# Altium PCB HBridge.PcbDoc (part 3 of 4)
Units mil, origin at the board's own origin, x right, y up, seen from the top; angles counter-clockwise.
Board outline 2900.19 x 4650 mil, 2 copper layers (Top Layer, Bottom Layer), stack 33.512 mil thick; 136 components, 122 nets, 499 pads, 559 vias.
Unrouted connection lines stored in the file: 1.
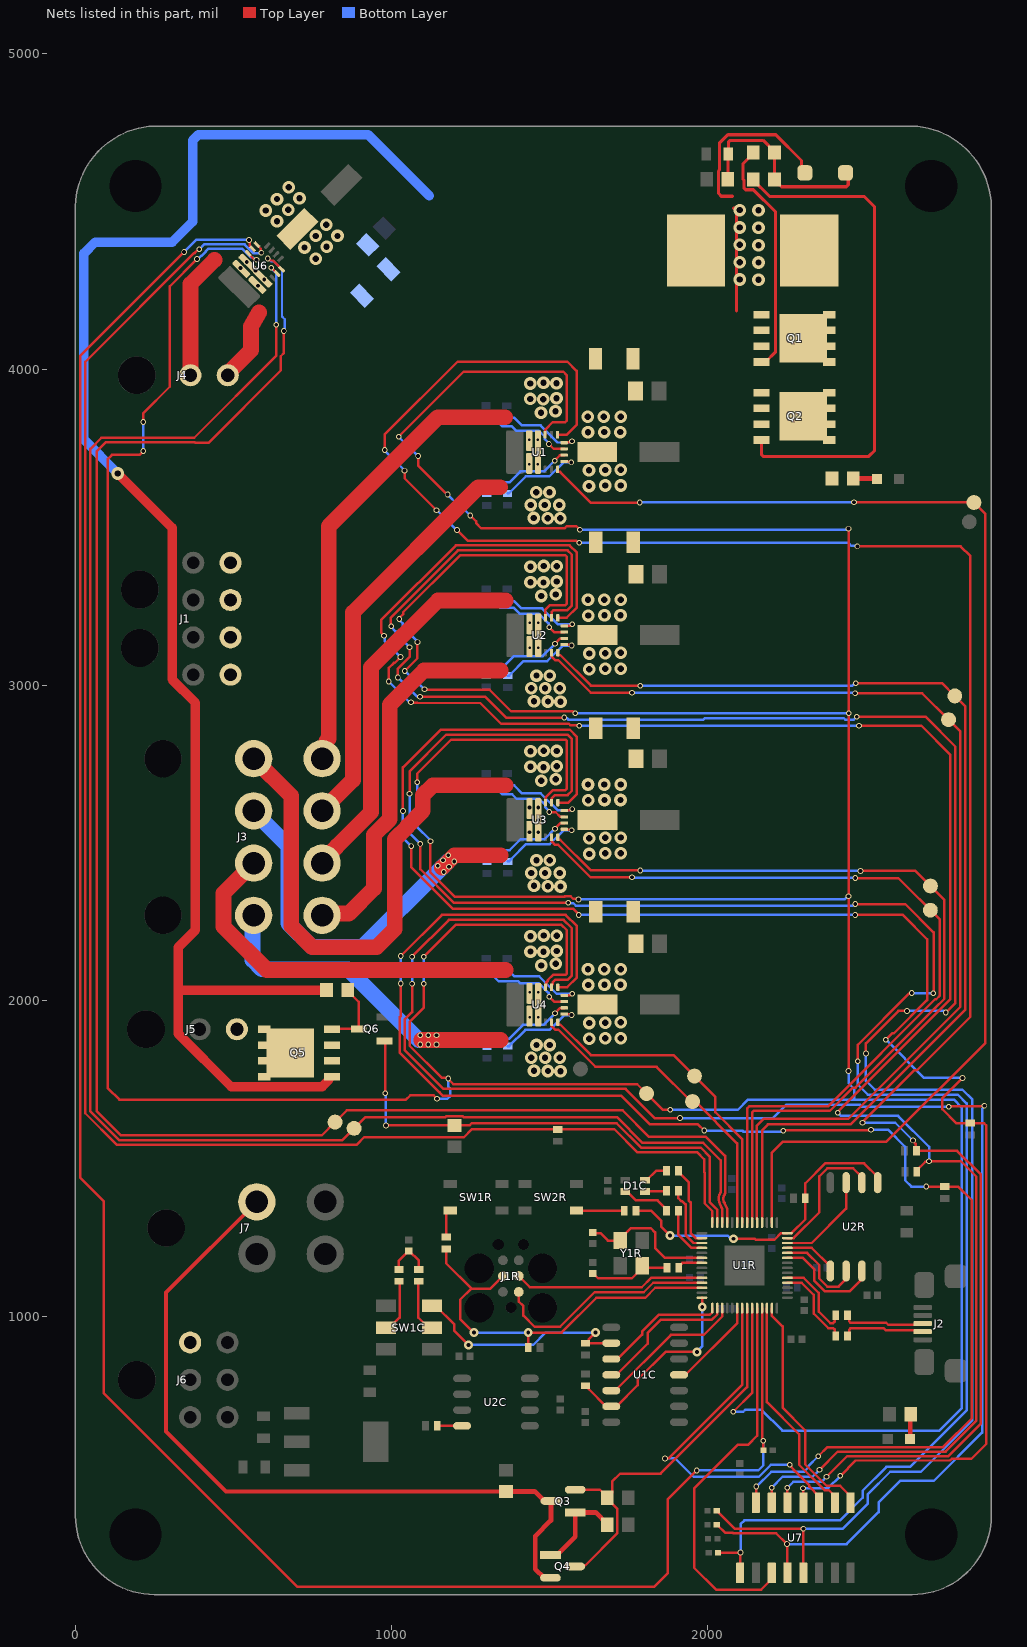
[diagram p2: the nets of this part, all layers, seen from the top]

## Via types
v1: diameter 40, hole 20, Top Layer to Bottom Layer, tented both sides, 289 vias
v2: diameter 18, hole 11.81, Top Layer to Bottom Layer, tented both sides, 171 vias
v3: diameter 27.56, hole 11.81, Top Layer to Bottom Layer, 32 vias
v4: diameter 19.68, hole 7.87, Top Layer to Bottom Layer, 21 vias
v5: diameter 19.68, hole 11.81, Top Layer to Bottom Layer, 14 vias
v6: diameter 27.56, hole 11.81, Top Layer to Bottom Layer, tented top, 9 vias
v7: diameter 45.28, hole 27.56, Top Layer to Bottom Layer, 7 vias
v8: diameter 31.5, hole 15.75, Top Layer to Bottom Layer, 7 vias
v9: diameter 31.5, hole 15.75, Top Layer to Bottom Layer, tented top, 6 vias
v10: diameter 26, hole 11.81, Top Layer to Bottom Layer, 1 vias
v11: diameter 22, hole 10, Top Layer to Bottom Layer, tented both sides, 1 vias
v12: diameter 28, hole 12, Top Layer to Bottom Layer, tented both sides, 1 vias

## Nets (pads, with @x,y where several pads share a name; then routed paths per layer and width w, separated by ;. In a path a pad name is that pad's centre, name@x,y a point inside that pad or via, vN(x,y) a via of type N, cw(c..) or ccw(c..) an arc to the next point about the centre after c; other vN are vias at no path point) (continued)
HBRIDGE1_nFAULT: R2.2 U1.1 U7.13 | length 6947.1
  Top Layer w7.87: v2(979,3744) 979,3793 1209.75,4023.75 1557.92,4023.75 1586.9,3994.78 1586.9,3823.9 1555.96,3792.96 U1.1@1526.48,3792.96 ; v2(1042,3679) 1042.75,3678.25 1042.75,3654.25 v2(1143.47,3553.53) ; v2(1208,3491) 1241.84,3457.16 1585.53,3457.16 1592.29,3450.4 v2(1595.03,3450.4) ; v2(2254,458) 2254.41,457.59 2254.41,411.63 U7.13@2254.81,411.22 ; v2(2378,493) 2443.72,558.72 2763.93,558.72 2867,661.79 2867,664.54 2867.17,664.72 2867.17,1448.87 2867,1449.04 2867,1449.85 2791.85,1525 R2.2@2662.7,1525 2660.3,1527.4 2660.3,1546.96 2651.88,1555.38 v2(2651.88,1558.12) ; v2(2476,3439) 2802.76,3439 2833.76,3408 2833.76,1949.76 2663.85,1779.85 2655.85,1779.85 2492,1616 v2(2492,1614)
  Bottom Layer w7.87: v2(979,3744) 979,3743 1042,3680 v2(1042,3679) ; v2(1143.47,3553.53) 1144.47,3553.53 1207,3491 v2(1208,3491) ; v2(1595.03,3450.4) 2446.25,3450.4 2450.72,3445.94 2451.25,3445.94 2456.25,3440.94 2474.06,3440.94 v2(2476,3439) ; v2(2254,458) 2273,477 2362,477 v2(2378,493) ; v2(2492,1614) 2596,1614 2651.38,1558.62 v2@2651.38,1557.62
HBRIDGE1_OUT1: J3.7 U1.7 | length 1299.1
  Top Layer w50: J3.7@780.94,2601.65 879,2699.71 879,3229.85 1275.15,3626 1345.15,3626
  other v4: 1436.91,3698.47
HBRIDGE1_OUT2: J3.8 U1.5 | length 1446.7
  Top Layer w50: J3.8@780.94,2767 793.97,2780.03 793.97,2822.31 802,2830.34 802,3502.85 1147.15,3848 1361.15,3848
  other v4: 1436.91,3777.21
HBRIDGE1_PH: H1PH.TP U1.10 U1R.2 | length 4137.4
  Top Layer w7.87: U1.10@1526.48,3682.72 1526.48,3675.83 1527.46,3674.85 1534.35,3674.85 1631.2,3578 v2(1787.15,3578) ; U1R.2@2205.47,1297.7 2205.47,1519.47 2240,1554 2568,1554 2881,1867 2881,3542 2840.27,3582.73 2836.04,3578.5 2465.5,3578.5 v2(2465,3579)
  Bottom Layer w7.87: v2(1787.15,3578) 1787.65,3578.5 2464.5,3578.5 v2(2465,3579)
HBRIDGE2_EN: H2EN.TP U1R.5 U2.9 | length 3373.3
  Top Layer w7.87: U2.9@1507.65,3102.72 1508.63,3101.74 1508.63,3089.14 1518.67,3079.1 1528.68,3079.1 1631.78,2976 v2(1762,2976) ; U1R.5@2158,1308.81 2158,1605 2179,1626 2447,1626 2802.26,1981.26 2802.26,2852.74 H2EN.TP@2764.63,2890.37 2681,2974 v2(2468.73,2974)
  Bottom Layer w7.87: v2(1762,2976) 2463.99,2976 2465.99,2974 v2(2468.73,2974)
HBRIDGE2_IPROPI: R8.2 U2.2 U7.5 | length 6795.8
  Top Layer w7.87: v2(1000,3186) 998.58,3187.42 998.58,3213.85 1211.23,3426.5 1558.16,3426.5 1572,3412.67 1572,3252.09 1556.49,3236.58 1513.24,3236.58 1508.63,3231.97 1508.63,3213.94 U2.2@1507.65,3212.96 ; v2(1021,3024) 1021,3052.16 1057.99,3089.15 v2(1058,3120) ; v2(1091,2963) 1091.33,2963.33 1297.3,2963.33 1363.48,2897.16 v2(1548,2897.16) ; R8.2@2030.76,385 2031.75,385 2088.75,328 v2(2305,328) 2304.91,327.91 2304.91,188.87 U7.5@2304.81,188.78 ; v2@2474.68,2900 2691,2900 2786.51,2804.49 2786.51,1993.57 v2(2755.97,1963.03) ; v2(2503,1833) 2503,1865.12 2605.88,1968 v2(2633,1968)
  Bottom Layer w7.87: v2(1000,3186) 1000,3183.57 1013.5,3170.07 1013.5,3164.5 v2(1058,3120) ; v2(1021,3024) 1080.06,2964.94 1089.06,2964.94 v2(1091,2963) ; v2(1548,2897.16) 1549.94,2895.22 1556.78,2895.22 1561.16,2890.84 1988.55,2890.84 1992.96,2895.25 2432.78,2895.25 2437.84,2890.19 2464.19,2890.19 v2(2474,2900) ; v2(2305,328) 2429,328 2509,408 2509,438 2580,509 2677,509 2840.25,672.25 2840.25,1687 2808.76,1718.5 2531.5,1718.5 2503,1747 v2(2503,1833) ; v2(2633,1968) v2(2633,1968) 2748.31,1967.95 2753.23,1963.03 v2(2755.97,1963.03)
HBRIDGE2_nFAULT: R3.2 U2.1 U7.14 | length 6529.1
  Top Layer w7.87: v2(976.89,3156.11) 976.89,3156.89 968,3165.78 968,3205.54 1204.71,3442.25 1564.69,3442.25 1587.75,3419.19 1587.75,3245.57 1555.14,3212.96 U2.1@1527.33,3212.96 ; v2(992,3011) 992,3054 1008.34,3070.34 1011.12,3070.34 v2(1029.39,3088.61) ; v2(1062.35,2945.65) 1064.29,2943.71 1082.23,2943.71 1082.78,2943.16 1281.84,2943.16 1347.69,2877.32 1562.56,2877.32 1567.01,2872.87 1593.13,2872.87 v2(1595,2871) ; U7.14@2204.81,411.22 2204.91,411.31 2204.91,457.91 v2(2205,458) ; v2(2356,515) 2413.89,572.89 2755.3,572.89 2853,670.59 2853,1443 2803.88,1492.12 v2(2702.88,1492.12) 2700.94,1490.18 2690.95,1490.18 2663.7,1462.93 R3.2@2663.7,1458.99 ; v2(2414,1645.84) 2414,1648.58 2419.06,1653.65 2419.06,1654.19 2770.76,2005.89 2770.76,2779 2678.76,2871 v2(2481,2871)
  Bottom Layer w7.87: v2(976.89,3156.11) 978.83,3154.17 978.83,3139.17 v2(1029.39,3088.61) ; v2(992,3011) 1055.42,2947.58 1060.42,2947.58 v2(1062.35,2945.65) ; v2(1595,2871) v2(2481,2871) ; v2(2205,458) 2205,459 2239,493 2334,493 v2(2356,515) ; v2(2414,1645.84) 2414,1645.68 2423.68,1636 2605,1636 2703,1538 v2@2703,1492
HBRIDGE2_OUT1: J3.5 U2.7 | length 1197.5
  Top Layer w50: J3.5@780.94,2270.94 786.23,2276.23 865.23,2276.23 945,2356 945,2525 995,2575 995,2937.51 1103.49,3046 1346,3046
  other v4: 1437.76,3118.47
HBRIDGE2_OUT2: J3.6 U2.5 | length 1197.6
  Top Layer w50: J3.6@776.94,2438.48 777.58,2438.48 828.59,2489.49 828.59,2490.13 936,2597.54 936,3056 1148,3268 1362,3268
  other v4: 1437.76,3197.21
HBRIDGE2_PH: H2PH.TP U1R.4 U2.10 | length 3412.7
  Top Layer w7.87: U2.10@1527.33,3102.72 1527.33,3095.83 1528.31,3094.85 1535.2,3094.85 1632.05,2998 v2(1788,2998) ; U1R.4@2174,1311.01 2174,1590 2192.84,1608.84 2453.84,1608.84 2818.01,1973.01 2818.01,2932 H2PH.TP@2784.33,2965.68 2744.01,3006 v2(2471,3006)
  Bottom Layer w7.87: v2(1788,2998) 2460.26,2998 2468.26,3006 v2(2471,3006)
HBRIDGE3_EN: H3EN.TP U1R.7 U3.9 | length 2704
  Top Layer w7.87: U3.9@1508.63,2516.74 1508.63,2504.14 1518.67,2494.1 1528.68,2494.1 1631.78,2391 v2(1762,2391) ; U1R.7@2126.73,1297.7 2126.73,1377.63 2127.39,1378.29 2127.39,1659.78 2134.61,1667 2384.06,1667 2722.09,2005.03 2725.66,2005.03 2737.28,2016.65 2737.28,2256.98 2605.35,2388.92 v2(2469.17,2388.92)
  Bottom Layer w7.87: v2(1762,2391) 1763.04,2389.96 2468.13,2389.96 v2(2469.17,2388.92)
HBRIDGE3_IPROPI: R20.2 U3.2 U7.1 | length 5926.3
  Top Layer w7.87: v2(1057.81,2656) 1057.81,2726.81 1174,2843 1558.53,2843 1572,2829.53 1572,2665.42 1558.16,2651.58 1518.67,2651.58 1507.65,2640.56 U3.2@1507.65,2627.96 ; v2(1092,2497) 1092,2416.67 1197.67,2311 v2(1560,2311) ; R20.2@2034.76,253 v2(2106,253) 2105.41,252.41 2105.41,189.37 U7.1@2104.81,188.78 ; v2(2469.15,2306.49) 2627.51,2306.49 2717.44,2216.56 2717.44,2025.03 v2(2716.47,2024.06) ; v2(2477,1809) 2477,1860.7 2639.23,2022.93 2646.19,2022.93 v2(2648.13,2024.87)
  Bottom Layer w7.87: v2(1057.81,2656) 1057.81,2531.19 v2(1092,2497) ; v2(1560,2311) 1561.94,2309.06 1576.88,2309.06 1584.78,2301.16 2461.08,2301.16 2465.82,2305.9 v2@2467,2305.9 ; v2(2106,253) 2106,343 2118,355 2421,355 2493,427 2493,449.52 2567.61,524.14 2642.86,524.14 2822,703.27 2822,1675 2794.25,1702.75 2509.25,1702.75 2477,1735 v2(2477,1809) ; v2(2648.13,2024.87) 2648.53,2024.47 2716.07,2024.47 v2(2716.47,2024.06)
HBRIDGE3_nFAULT: R18.2 U3.1 U7.12 | length 5565.4
  Top Layer w7.87: v2(1037,2601) 1037,2739 1157,2859 1560.83,2859 1561.14,2858.69 1565.31,2858.69 1588,2836 1588,2655 1561,2628 1552.18,2628 1552.14,2627.96 U3.1@1527.33,2627.96 ; v2(1063,2490) 1063,2423.4 1195.24,2291.16 1576.41,2291.16 1594.06,2273.51 v2(1594.06,2271.94) ; v2(2304,457) 2304.41,456.59 2304.41,411.63 U7.12@2304.81,411.22 ; v2(2422,496) 2470.54,544.54 2769.8,544.54 2775.26,550 2837,550 2884.13,597.13 2884.13,1605.39 2877.52,1612 2831,1612 2789.94,1612 2745.16,1656.78 2745.16,1692.16 v2(2809,1756) ; v2(2468.73,2272) 2619.76,2272 2696.63,2195.13 2696.63,2002.63 2591.19,1897.19 2586.19,1897.19 v2(2566,1877)
  Bottom Layer w7.87: v2(1037,2601) 1037,2516 v2(1063,2490) ; v2@1594.09,2271.97 v2(2468.73,2272) ; v2(2304,457) 2383,457 v2(2422,496) ; v2(2566,1877) 2687,1756 v2(2809,1756)
HBRIDGE3_OUT1: J3.3 U3.7 | length 1268.3
  Top Layer w50: 1161,2422 1200,2461 1346,2461
  Top Layer w70: J3.3@560.4,2590.81 J3.3@560.4,2603.83
  Bottom Layer w50: J3.3@560.4,2603.83 674,2490.23 674,2246.05 749.05,2171 909,2171 1155,2417 1180,2442
  other v2: 1166,2408 1183,2425 1147,2428 1199,2441 1164,2445 1180,2461
  other v5: 1437.76,2533.47
HBRIDGE3_OUT2: J3.4 U3.5 | length 1694
  Top Layer w50: J3.4@564.4,2767 683,2648.4 683,2237.05 750.05,2170 953.3,2170 1011,2227.7 1011,2511.38 1051.3,2551.68 1051.3,2553.3 1100,2602 1100,2650.78 1132.22,2683 1362,2683
  other v5: 1437.76,2612.21
HBRIDGE3_PH: H3PH.TP U1R.6 U3.10 | length 2716.9
  Top Layer w7.87: U3.10@1527.33,2517.72 1527.33,2510.83 1528.31,2509.85 1535.2,2509.85 1632.05,2413 v2(1788,2413) ; U1R.6@2142.48,1310.98 2142.48,1646.64 2147.09,1651.25 2388.58,1651.25 2462.64,1725.31 2470.14,1725.31 2721.95,1977.12 2751.46,2006.62 2751.46,2319.56 H3PH.TP@2707.3,2363.72 2659.58,2411.43 v2(2486.05,2411.43)
  Bottom Layer w7.87: v2(1788,2413) 1788.78,2412.22 2485.27,2412.22 v2(2486.05,2411.43)
HBRIDGE4_EN: H4EN.TP U1R.9 U4.9 | length 1004.4
  Top Layer w7.87: U4.9@1507.64,1932.72 1508.62,1931.74 1508.62,1919.14 1518.66,1909.1 1528.68,1909.1 1646,1791.78 1646,1791 1840,1791 H4EN.TP@1952,1679 ; H4EN.TP@1954,1681 1963,1681 2095.24,1548.76 U1R.9@2095.24,1297.7
HBRIDGE4_IPROPI: R21.2 U4.2 U7.4 | length 5214.1
  Top Layer w7.87: v2(1066,2054) 1066,1964.52 1042.44,1940.97 1042.44,1844.56 1166,1721 1742,1721 1834,1629 v2(1914.48,1629) ; v2(1066,2139.87) 1182.63,2256.5 1545.5,2256.5 1572,2230 1572,2080.42 1558.16,2066.58 1518.66,2066.58 1510.59,2058.51 1510.59,2052.8 1507.17,2049.39 U4.2@1507.17,2043.42 ; R21.2@2030.76,341 2031.75,341 2057.75,315 2081.7,315 2082.88,313.83 2219.17,313.83 v2(2253,280) 2253.91,279.09 2253.91,189.69 U7.4@2254.81,188.78 ; v2(2765,1665) 2766.45,1666.45 2876.68,1666.45 v2(2878.13,1667.9)
  Bottom Layer w7.87: v2(1066,2139.87) v2(1066,2054) v2@1067,2053 ; v2(1914.48,1629) 2209,1629 2251.25,1671.25 2483.89,1671.25 2490.14,1665 v2(2765,1665) ; v2(2253,280) 2442,280 2543.19,381.19 2543.19,411.89 2611.12,479.83 2717.83,479.83 2871,633 2871,1658.22 2878.13,1665.35 v2(2878.13,1667.9)
HBRIDGE4_nFAULT: R19.2 U4.1 U7.15 | length 4758.4
  Top Layer w7.87: v2(1029.94,2055.06) 1029.94,1951.64 1026.69,1948.39 1026.69,1836.31 1153.16,1709.84 1153.22,1709.84 1164.06,1699 1729,1699 1818.9,1609.1 1971.23,1609.1 v2(1991.07,1589.26) ; v2(1029.94,2141.81) 1160.38,2272.25 1552.02,2272.25 1587.75,2236.52 1587.75,2073.9 1556.81,2042.96 U4.1@1527.32,2042.96 ; U7.15@2154.81,411.22 2155.41,411.81 2155.41,461.41 v2(2156,462) ; v2(2241,1589) 2242.5,1590.5 2517.5,1590.5 v2(2519,1592) ; v2(2352,558) 2381.06,587.06 2747.47,587.06 2838,677.59 2838,1369 2795,1412 2753,1412 v2(2694,1412)
  Bottom Layer w7.87: v2(1029.94,2055.06) v2(1029.94,2141.81) ; v2(1991.07,1589.26) 1992.11,1588.22 2112.43,1588.22 2115.65,1585 2234.26,1585 2238.26,1589 v2(2241,1589) ; v2(2156,462) 2156.43,462 2203.43,509 2307,509 2321,523 2321,527 v2(2352,558) ; v2(2519,1592) 2573,1592 2627,1538 2627,1432 2647,1412 v2(2694,1412)
HBRIDGE4_OUT1: J3.1 U4.7 | length 1107.5
  Top Layer w50: 1095,1876 1346,1876
  Bottom Layer w50: J3.1@560.4,2273.12 560.4,2129.29 589.69,2100 863,2100 1087,1876 1168.16,1876
  other v2: 1092,1862 1117,1862 1143,1862 1092,1891 1117,1891 1143,1891
  other v4: 1437.75,1948.47
HBRIDGE4_OUT2: J3.2 U4.5 | length 1191.8
  Top Layer w50: J3.2@560.4,2438.48 560.4,2432.75 468.47,2340.83 468.47,2235.05 605.52,2098 1362,2098
  other v4: 1437.75,2027.21
HBRIDGE4_PH: H4PH.TP U1R.8 U4.10 | length 1027.4
  Top Layer w7.87: U4.10@1527.32,1925.83 1528.31,1924.85 1535.2,1924.85 1632.05,1828 1894,1828 H4PH.TP@1960.11,1761.89 2026.23,1695.77 2026.23,1647.29 2110.98,1562.53 U1R.8@2110.98,1297.7
HBRIDGE5_EN: H5EN.TP U1R.12 U6.9 | length 5443.1
  Top Layer w7.87: v2(620.1,4321.3) 620.27,4321.3 638.65,4302.92 U6.9@638.82,4302.92 ; v2(636,4141) 636,4043.15 376.01,3783.16 82.16,3783.16 47,3748 47,1650.08 137.91,1559.17 845.17,1559.17 H5EN.TP@882.39,1596.39 917.78,1631.78 1171.14,1631.78 1173.8,1634.44 1226.2,1634.44 1228.86,1631.78 1714.22,1631.78 1796,1550 1988,1550 2042.63,1495.37 2042.63,1394.68 cw(c2034.75,1394.72) 2041.62,1390.86 ccw(c2073,1373) 2039.94,1358.47 2047.99,1340.15 U1R.12@2047.99,1297.7
  Bottom Layer w7.87: v2(620.1,4321.3) 620.1,4318.9 636,4303 v2(636,4141)
HBRIDGE5_IPROPI: R34.2 U1R.39 U6.2 | length 7205.8
  Top Layer w7.87: v2(344,4371.22) 15.75,4042.97 15.75,1439.25 90,1365 90,757 703,144 1832,144 1876,188 1876,422.24 v2(1966.88,513.12) ; v2(549.4,4409.4) 551.34,4407.46 551.34,4391.79 560.87,4382.26 U6.2@560.87,4380.87 ; U1R.39@2173.98,1027.03 2173.98,613.76 2178,609.74 v2(2178,607) 2178.12,606.88 2178.12,577.12 R34.2@2178.24,577
  Bottom Layer w7.87: v2(344,4371.22) 382.18,4409.4 v2(549.4,4409.4) ; v2@1965,513 2162,513 2178,529 v2(2178,607)
HBRIDGE5_nFAULT: R33.2 U1R.14 U6.1 | length 5405.9
  Top Layer w7.87: v2(392.12,4379.88) 389.38,4379.88 377.31,4367.81 375.81,4367.81 31,4023 31,1644 130,1545 891,1545 914,1568 1230,1568 1255.7,1593.7 1527,1593.7 1705.94,1593.7 1779.64,1520 1969.13,1520 1991.06,1498.06 1991.06,1456.94 1992,1456 1992,1359.07 2016.5,1334.57 U1R.14@2016.5,1297.7 ; U6.1@574.79,4394.79 574.79,4393.4 586.8,4381.39 586.8,4371.01 v2(588.74,4369.08)
  Bottom Layer w7.87: v2(392.12,4379.88) 407.43,4395.22 535.51,4395.22 562.73,4368 587.66,4368 v2(588.74,4369.08)
HBRIDGE5_OUT1: J4.2 U6.7 | length 236.1
  Top Layer w50: J4.2@482.13,3981 482.13,3986.41 556,4060.28 556,4135 581,4180
  other v5: 578.27,4264.64
HBRIDGE5_OUT2: J4.1 U6.5 | length 396.5
  Top Layer w50: J4.1@364.02,3981 364.04,4270.04 440.05,4346.05
  other v5: 522.59,4320.32
HBRIDGE5_PH: H5PH.TP U1R.11 U6.10 | length 5551.1
  Top Layer w7.87: 377.58,3768.58 95.58,3768.58 67,3740 67,1651 144,1574 780,1574 H5PH.TP@822,1616 859,1653 1733.05,1653 1816.63,1569.42 1996.58,1569.42 2056.8,1509.2 2056.8,1390.58 cw(c2048.92,1390.58) 2055.29,1385.94 ccw(c2073,1373) 2055.26,1360.1 cw(c2048.92,1355.42) 2056.18,1358.48 2063.74,1340.55 U1R.11@2063.74,1297.7 ; 379.53,3766.63 379.9,3767 421,3767 650.17,3996.17 650.17,4041.17 660,4051 v2(660,4121) ; v2(609.29,4350.38) 611.79,4350.38 617.84,4344.33 625.13,4344.33 652.63,4316.84 U6.10@652.74,4316.84
  Bottom Layer w7.87: v2(609.29,4350.38) 612.03,4350.38 620.87,4341.54 627.92,4341.54 654,4315.46 654,4166.96 662.75,4158.21 662.75,4142.35 661.94,4141.54 661.94,4122.94 v2(660,4121)
INT_RP2CAN: U1C.4 U1R.34 | length 299.7
  Top Layer w7.87: U1C.4@1911.18,815.91 1932.17,815.91 2095.24,978.97 U1R.34@2095.24,1027.03
LEDB_RP2CAN: R8C.1 U1R.18 | length 168.1
  Top Layer w7.87: R8C.1@1909.21,1335.59 1909.21,1258.94 1950.67,1217.48 U1R.18@1983.52,1217.48
LEDG_RP2CAN: R7C.1 U1R.17 | length 213.3
  Top Layer w7.87: R7C.1@1909.21,1398.58 1909.21,1374.96 1919.07,1365.1 1921.99,1365.1 1931.85,1355.25 1931.85,1258.57 1957.19,1233.23 U1R.17@1983.52,1233.23
LEDR_RP2CAN: R5C.1 U1R.16 | length 255
  Top Layer w7.87: R5C.1@1909.21,1461.57 1909.21,1457.64 1942.57,1424.28 1942.57,1366.79 1947.6,1361.77 1947.6,1265.09 1963.71,1248.98 U1R.16@1983.52,1248.98
MISO_RP2CAN: U1C.12 U1R.31 | length 475
  Top Layer w7.87: U1C.12@1696.61,765.91 1709.09,765.91 1885.46,942.28 1989.58,942.28 2047.99,1000.69 U1R.31@2047.99,1027.03
MOSI_RP2CAN: U1C.11 U1R.30 | length 454.6
  Top Layer w7.87: U1C.11@1696.61,815.91 1713.35,815.91 1811.77,914.33 1811.77,948.31 1852.99,989.53 2014.55,989.53 2032.24,1007.22 U1R.30@2032.24,1027.03
MP_DATA: U1R.38 U7.3 | length 1231.6
  Top Layer w7.87: U1R.38@2158.23,1027.03 2158.23,622.84 2129.23,593.84 2096.78,593.84 1959,456.06 1959,205 2028.25,135.75 2171.47,135.75 2204.81,169.09 U7.3@2204.81,188.78
MP_S0: U1R.35 U7.11 | length 1176.5
  Top Layer w7.87: v2(1867,551) 1868.34,552.34 1879.34,552.34 2110.98,783.98 U1R.35@2110.98,1027.03 ; v2(2262,531) 2262,528.26 2275.07,515.19 2275.07,513.99 2323.84,465.22 2323.84,461.88 2354.81,430.91 U7.11@2354.81,411.22
  Bottom Layer w7.87: v2(1867,551) 1899.37,551 1957.3,493.07 2164.07,493.07 2202,531 v2(2262,531)
MP_S1: U1R.40 U7.10 | length 712.4
  Top Layer w7.87: U1R.40@2189.72,1027.03 2189.72,729.28 2292,627 2292,530.89 2372.36,450.53 2385.19,450.53 2404.81,430.91 U7.10@2404.81,411.22
MP_S2: U1R.41 U7.9 | length 744.1
  Top Layer w7.87: U1R.41@2205.47,1027.03 2205.47,1002.53 2239,969 2239,712 2311,640 2311,531.94 2378.23,464.7 2421.01,464.7 2454.81,430.91 U7.9@2454.81,411.22
nCS_RP2CAN: R4C.2 U1C.13 U1R.28 | length 646.2
  Top Layer w7.87: R4C.2@1614.92,781.46 1618.86,781.46 1625.75,774.57 1625.75,770.04 1679.88,715.91 U1C.13@1696.61,715.91 1713.35,715.91 1780.54,783.09 1780.54,800.42 1869.65,889.53 1966.5,889.53 v6(1968.05,887.97) ; U1R.28@1983.52,1060 1985,1060 v6(1985,1030.87)
  Bottom Layer w7.87: v6(1968.05,887.97) 1968.05,890.27 1985,907.21 v6(1985,1030.87)
NetC1_2: C1.2 C3.1 F1.2 U1.4
  other v1: 1495.15,3528 1535.15,3527.81 1451.15,3529 1442.15,3570 1486.15,3570 1532.15,3570 1459.15,3610 1501.15,3610 1626.15,3630 1677.15,3632 1726.15,3632 1626.15,3680 1677.15,3681 1726.15,3682 1623.15,3800 1674.15,3801 1725.15,3801 1622.15,3850 1673.15,3850 1726.15,3850 1474.15,3862 1520.15,3867 1481.15,3905 1440.15,3906 1523.15,3908 1440.15,3955 1523.15,3956 1482.15,3957
  other v4: 1464.47,3698.47 1464.47,3737.84 1464.47,3777.21
NetC2_2: C2.2 C4.1 F2.2 U2.4
  other v1: 1536,2947 1496,2948 1452,2949 1443,2990 1487,2990 1533,2990 1460,3030 1502,3030 1627,3050 1678,3052 1727,3052 1627,3100 1678,3101 1727,3102 1624,3220 1675,3221 1726,3221 1623,3270 1674,3270 1727,3270 1475,3282 1521,3287 1482,3325 1441,3326 1524,3328 1441,3375 1524,3376 1483,3377
  other v4: 1465.32,3118.47 1465.32,3157.84 1465.32,3197.21
NetC2C_2: C2C.2 R2C.2 R3C.2 | length 144.3
  Top Layer w7.87: R3C.2@1024.37,1149.57 1024.37,1177.52 1055.08,1208.23 C2C.2@1055.87,1208.23 1056.65,1208.23 1087.36,1177.52 R2C.2@1087.36,1149.57
NetC2R_1: C2R.1 R1R.2 Y1R.3 | length 263.4
  Top Layer w8: C2R.1@1638.54,1137.36 1639.33,1137.36 1655.02,1121.67 1761.63,1121.67 1795.16,1155.2 Y1R.3@1795.16,1161.1 1801.77,1154.49 R1R.2@1872.87,1154.49
NetC5_2: C5.2 D1.1 R1.2 R6.1 R9.1 | length 658.9
  Top Layer w10: R9.1@2066,4601.5 R9.1@2068.76,4598.74 ; R9.1@2066,4603.74 2066,4680 C5.2@2067.5,4681.5 2067.5,4718.64 2073.36,4724.5 2177.49,4724.5 2213.5,4688.49 R1.2@2213.5,4685.99 2213.5,4598.49 2228.5,4583.49 2231,4583.49 2236.49,4578 2441.14,4578 2447,4583.86 2447,4613.37 D1.1@2438.37,4622
NetC6_2: C6.2 C8.1 F4.2 U3.4
  other v1: 1536,2362 1496,2363 1452,2364 1443,2405 1487,2405 1533,2405 1460,2445 1502,2445 1627,2465 1678,2467 1727,2467 1627,2515 1678,2516 1727,2517 1624,2635 1675,2636 1726,2636 1623,2685 1674,2685 1727,2685 1475,2697 1521,2702 1482,2740 1441,2741 1524,2743 1441,2790 1524,2791 1483,2792
  other v5: 1465.32,2533.47 1465.32,2572.84 1465.32,2612.21
NetC7_2: C7.2 C9.1 F5.2 U4.4
  other v1: 1536,1777 1496,1778 1452,1779 1443,1820 1487,1820 1533,1820 1460,1860 1502,1860 1627,1880 1678,1882 1727,1882 1627,1930 1678,1931 1727,1932 1624,2050 1675,2051 1726,2051 1623,2100 1674,2100 1727,2100 1475,2112 1521,2117 1482,2155 1441,2156 1524,2158 1441,2205 1524,2206 1483,2207
  other v4: 1465.31,1948.47 1465.31,1987.84 1465.31,2027.21
NetC14_2: C14.2 C15.1 F6.2 U6.4
  other v1: 760.5,4350.03 725.14,4385.39 795.14,4387.51 760.5,4422.16 829.79,4422.16 794.44,4457.51 638.17,4468.12 602.1,4502.77 673.52,4504.89 638.17,4538.83 709.58,4540.95 675.64,4576.31
  other v5: 597.76,4284.13 569.92,4311.97 542.08,4339.81
NetD1C_1: D1C.1 R5C.2 | length 80.1
  Top Layer w7.87: D1C.1@1803.9,1432.05 1808.82,1432.05 1838.35,1461.57 R5C.2@1871.81,1461.57
NetD1C_2: D1C.2 R7C.2 | length 68.7
  Top Layer w7.87: D1C.2@1803.9,1396.61 1869.84,1396.61 R7C.2@1871.81,1398.58
NetD1C_3: D1C.3 R8C.2 | length 158.5
  Top Layer w7.87: D1C.3@1740.91,1396.61 1745.83,1396.61 1774.37,1368.07 1843.27,1368.07 1871.81,1339.53 R8C.2@1871.81,1335.59
NetD2_1: D2.1 R5.2 | length 75.9
  Top Layer w9.84: D2.1@2537,3654 D2.1@2538,3653
  Top Layer w15: R5.2@2462.5,3654 D2.1@2537,3654
NetD3_1: D3.1 R4.1 | length 83
  Top Layer w15: D3.1@2642,609 2643.25,610.25 2643.25,689.75 R4.1@2644.5,691
NetF3_2: F3.2 Q1.D Q2.D
NetQ1_4: Q1.4 R1.1 | length 781.7
  Top Layer w10: R1.1@2146.5,4685.99 2146.5,4683.49 2113.63,4650.62 2113.63,4601.37 2116.5,4598.5 2116.5,4574.35 2122.36,4568.49 2146.51,4568.49 2217,4498 2217,4055.01 2185,4023.01 Q1.4@2172,4023.01 2160.05,4023.01 Q1.4@2153.05,4030.01
NetQ2_4: Q2.4 R6.2 | length 1607.6
  Top Layer w10: R6.2@2146.5,4600.99 2146.5,4598.49 2197.99,4547 2498,4547 2530,4515 2530,3742 2512,3724 2177.86,3724 2172,3729.86 Q2.4@2172,3776
NetQ3_1: Q3.1 Q4.1 R30.2 | length 298
  Top Layer w15: Q4.1@1504.09,245.02 1524.41,245.02 1582.45,303.07 Q3.1@1582.45,379.98 1646.85,379.98 1683.5,343.32 R30.2@1683.5,340.82
NetQ5_4: Q5.4 Q6.3 R38.2 | length 222.1
  Top Layer w7.87: Q5.4@812.7,1910 813.7,1911 Q6.3@897,1911 897,1996.43 862,2031.43 R38.2@862,2033.93
NetR2C_1: R2C.1 SW1C.2 | length 172.3
  Top Layer w7.87: R2C.1@1087.36,1112.17 1085.39,1110.2 1085.39,997.01 1116.89,965.51 SW1C.2@1128.7,965.51
NetR3C_1: R3C.1 SW1C.5 | length 172.3
  Top Layer w7.87: SW1C.5@983.03,965.51 994.84,965.51 1026.34,997.01 1026.34,1110.2 R3C.1@1024.37,1112.17
NetR6C_1: R6C.1 U2C.8 | length 78.7
  Top Layer w7.87: R6C.1@1145.43,654.29 U2C.8@1224.17,654.29
NetR6R_1: R6R.1 SW1R.A2 | length 91.3
  Top Layer w7.87: R6R.1@1173.98,1251.93 1173.98,1326.73 1182.83,1335.59 SW1R.A2@1186.77,1335.59
NetR7R_1: R7R.1 SW2R.A1 | length 151.6
  Top Layer w7.87: SW2R.A1@1586.38,1335.59 R7R.1@1737.95,1335.59
NetR10_1: R10.1 U1.14 | length 265.4
  Top Layer w7.87: U1.14@1547.15,3767.37 1548.13,3768.35 1565.96,3768.35 v2@1569.75,3772.15
  Bottom Layer w7.87: R10.1@1366.15,3847 1388.5,3847 1413.5,3822 1472.58,3822 1526.58,3768 1568.34,3768 v2(1572.49,3772.15)
NetR11_1: R11.1 U2.14 | length 264.7
  Top Layer w7.87: U2.14@1548,3187.37 1548.98,3188.35 1566.81,3188.35 1570.6,3192.15 v2(1573.34,3192.15)
  Bottom Layer w7.87: R11.1@1367,3267 1367.96,3266.04 1388.96,3266.04 1412,3243 1477.36,3243 1528.21,3192.15 v2(1573.34,3192.15)
NetR12_1: R12.1 U1.13 | length 291.6
  Top Layer w7.87: v2(1499.15,3763) 1514.47,3747.68 U1.13@1547.15,3747.68
  Bottom Layer w7.87: R12.1@1300.15,3847.3 1323.85,3847.3 1323.85,3847.01 1351.92,3818.93 1382.22,3818.93 1396.15,3805 1467.31,3805 1486.13,3786.18 1486.13,3778.76 v2@1499.15,3765.74
NetR13_1: R13.1 U2.13 | length 297.4
  Top Layer w7.87: v2(1500,3183) 1515.32,3167.68 U2.13@1548,3167.68
  Bottom Layer w7.87: R13.1@1301,3267.3 1327.57,3267.3 1340.43,3254.45 1340.43,3248.97 1345.04,3244.36 1388.37,3244.36 1406.48,3226.25 1466.91,3226.25 1498.06,3195.09 1498.06,3184.94 v2(1500,3183)
NetR14_1: R14.1 U1.12 | length 312.5
  Top Layer w7.87: v2(1517.33,3710.36) 1517.33,3710.77 1533.57,3727.02 1546.17,3727.02 U1.12@1547.15,3728
  Bottom Layer w7.87: R14.1@1302.15,3605.7 1302.15,3634 1310.15,3642 1374.15,3642 1408.97,3676.82 1483.79,3676.82 v2(1517.33,3710.36)
NetR15_1: R15.1 U2.12 | length 295.4
  Top Layer w7.87: v2(1518.18,3130.36) 1518.18,3130.77 1534.42,3147.02 1547.02,3147.02 U2.12@1548,3148
  Bottom Layer w7.87: R15.1@1301,3031.7 1328.71,3031.7 1388.64,3091.63 1479.45,3091.63 v2(1518.18,3130.36)
NetR16_1: R16.1 U1.11 | length 270.4
  Top Layer w7.87: U1.11@1547.15,3708.31 1548.13,3707.33 1565.08,3707.33 1567.41,3705 v2(1570.15,3705) v2@1567.82,3707.33
  Bottom Layer w7.87: R16.1@1368.15,3606.69 1372.09,3606.69 1426.47,3661.07 1500.85,3661.07 1544.78,3705 v2(1570.15,3705)
NetR17_1: R17.1 U2.11 | length 265.8
  Top Layer w7.87: U2.11@1548,3128.31 1548.98,3127.33 1565.93,3127.33 1568.26,3125 v2(1571,3125)
  Bottom Layer w7.87: R17.1@1369,3029.7 1372.94,3029.7 1379.83,3036.59 1419.12,3075.88 1494.05,3075.88 1543.16,3125 v2(1571,3125)
NetR22_1: R22.1 U3.14 | length 268.1
  Top Layer w7.87: U3.14@1548,2602.37 1548.98,2603.35 1566.81,2603.35 1570.6,2607.15 v2(1573.34,2607.15)
  Bottom Layer w7.87: R22.1@1367,2682 1389.35,2682 1414.35,2657 1473.43,2657 1527.43,2603 1564.25,2603 1566.47,2605.21 1571.41,2605.21 v2(1573.34,2607.15)
NetR23_1: R23.1 U4.14 | length 264.7
  Top Layer w7.87: U4.14@1547.99,2017.37 1548.97,2018.35 1566.81,2018.35 1570.6,2022.15 v2(1573.34,2022.15)
  Bottom Layer w7.87: R23.1@1367,2097 1370.94,2097 1390.38,2077.56 1468.44,2077.56 1523.85,2022.15 v2(1573.34,2022.15)
NetR24_1: R24.1 U3.13 | length 294.4
  Top Layer w7.87: v2(1500,2598) 1500.72,2597.28 1520.81,2597.28 1534.42,2583.67 1547.02,2583.67 U3.13@1548,2582.68
  Bottom Layer w7.87: R24.1@1301,2682.3 1324.7,2682.3 1336.02,2670.98 1336.02,2670.68 1352.77,2653.93 1383.07,2653.93 1397,2640 1468.16,2640 1486.98,2621.18 1486.98,2613.76 1500,2600.74 v2(1500,2598)
NetR25_1: R25.1 U4.13 | length 294.2
  Top Layer w7.87: v2(1500,2013) 1515.32,1997.68 U4.13@1547.99,1997.68
  Bottom Layer w7.87: R25.1@1301,2097.3 1304.94,2097.3 1340.43,2061.81 1402.27,2061.81 1407.83,2056.25 1466.9,2056.25 1498.06,2025.09 1498.06,2014.94 v2(1500,2013)
NetR26_1: R26.1 U3.12 | length 312.5
  Top Layer w7.87: v2(1518.18,2545.36) 1518.18,2545.77 1534.42,2562.02 1547.02,2562.02 U3.12@1548,2563
  Bottom Layer w7.87: R26.1@1303,2440.7 1303,2469 1311,2477 1375,2477 1409.82,2511.82 1484.64,2511.82 v2(1518.18,2545.36)
NetR27_1: R27.1 U4.12 | length 303
  Top Layer w7.87: v2(1518.18,1960.78) 1534.41,1977.02 1547.01,1977.02 U4.12@1547.99,1978
  Bottom Layer w7.87: R27.1@1303,1855.7 1337.81,1855.7 1342.43,1860.31 1342.43,1872.38 1349.34,1879.3 1372.3,1879.3 1417.05,1924.05 1481.87,1924.05 1518.18,1960.36 v2(1518.18,1960.78)
NetR28_1: R28.1 U3.11 | length 267.8
  Top Layer w7.87: U3.11@1548,2543.31 1548.98,2542.33 1565.93,2542.33 1568.26,2540 v2(1571,2540)
  Bottom Layer w7.87: R28.1@1369,2441.66 1372.94,2441.66 1379.83,2448.55 1379.83,2449.76 1426.13,2496.07 1501.7,2496.07 1545.63,2540 v2(1571,2540)
NetR29_1: R29.1 U4.11 | length 267.1
  Top Layer w7.87: U4.11@1547.99,1958.31 1548.97,1957.33 1565.93,1957.33 1568.26,1955 v2(1571,1955)
  Bottom Layer w7.87: R29.1@1369,1856.66 1372.94,1856.66 1424.58,1908.31 1501.31,1908.31 1548,1955 v2(1571,1955)
NetR34_1: 
NetR35_1: 
NetR36_1: 
NetR37_1: 
NetSB1_1: 
nSLEEP: nSLEEP.TP U1.3 U1R.37 U2.3 U3.3 U4.3 U6.3 | length 18430.5
  Top Layer w7.87: v2(215,3741) 202.58,3728.58 115.58,3728.58 103,3716 103,1723 138.84,1687.16 1046.47,1687.16 1060.31,1701 1134,1701 v2(1145,1690) ; v2(215,3833.04) 215,3861 298.65,3944.65 298.65,4262.5 v2(385.08,4348.92) ; U6.3@546.95,4366.95 565.55,4348.35 571.32,4348.35 v2(573.26,4346.41) ; v2@1023.72,3786.53 1229.19,3992 1545.13,3992 1555.4,3981.73 1555.4,3836.94 1550.79,3832.33 1511.3,3832.33 1488.09,3809.13 1488.09,3793.94 U1.3@1487.11,3792.96 ; v2(1025,3209) 1025,3211.74 1038,3224.74 1038,3231 1217.76,3410.76 1551.64,3410.76 1556.25,3406.14 1556.25,3258.62 1549.97,3252.33 1501.33,3252.33 1487.96,3238.96 U2.3@1487.96,3212.96 ; v2(1042.64,3044.36) 1083,3084.73 v2(1083,3136) ; v2(1082,2692) 1082,2719 1190,2827 1551.64,2827 1556.25,2822.39 1556.25,2671.94 1551.64,2667.33 1512.15,2667.33 1488.94,2644.13 1488.94,2628.94 U3.3@1487.96,2627.96 ; v2(1085,3725) 1085,3695 1176.6,3603.4 v2(1178.36,3603.4) ; v2(1103,2054) 1103,1978.41 1058.19,1933.6 1058.19,1857.81 1160.06,1755.94 1178.06,1755.94 v2(1180,1754) 1180,1753 1197,1736 1779,1736 nSLEEP.TP@1808.5,1706.5 1860,1655 v2(1883,1655) ; v2(1103,2139.87) 1203.88,2240.76 1209.74,2240.76 1538.97,2240.76 1556.25,2223.48 1556.25,2086.94 1551.64,2082.33 1512.15,2082.33 1496.48,2066.68 ; v2(1104.96,2986.63) 1106.6,2985 1311.37,2985 1379.37,2917 1573.94,2917 1580.26,2910.68 v2(1583,2910.68) ; v2(1124.27,2505.74) 1124.19,2505.66 1124.19,2406.75 1200.75,2330.19 1549.18,2330.19 1549.83,2330.84 1568.22,2330.84 1576.12,2322.94 1591.06,2322.94 v2(1593,2321) ; v2(1250,3537) 1268.47,3518.53 1268.47,3512.53 1285,3496 1548.33,3496 1555.18,3502.86 1586.4,3502.86 v2@1597.23,3492.03 ; U4.3@1490.91,2045.91 1490.91,2058.51 1494.85,2062.45 1494.85,2065.03 1496.48,2066.67 ; v2(2083,699) 2142.48,758.48 2142.48,1013.74 U1R.37@2142.48,1027.03 ; v2(2447.92,1777.62) v2(2447.92,2331) ; v2@2447.92,2911 v2(2447.92,3495.38) ; v2@2448.36,2333.36 v2@2448.36,2910.55
  Bottom Layer w7.87: v2(215,3741) v2(215,3833.04) ; v2(385.08,4348.92) 387.82,4348.92 398.93,4360.04 400.34,4360.04 411.96,4371.66 411.96,4373.07 419.94,4381.05 528.89,4381.05 556.12,4353.83 563.1,4353.83 570.52,4346.41 v2(573.26,4346.41) ; v2(1023.72,3786.02) 1066,3743.74 1066.26,3743.74 v2(1085,3725) ; v2(1025,3209) 1025,3206.26 1036.24,3195.02 1036.24,3185.24 1083,3138.49 v2(1083,3136) ; v2(1042.64,3044.36) 1043.64,3044.36 1085.67,3002.33 1089.26,3002.33 v2(1104.96,2986.63) ; v2(1082,2692) 1082,2550.74 1124.27,2508.48 v2(1124.27,2505.74) ; v2(1103,2054) v2(1103,2139.87) ; v2(1145,1690) 1178,1690 1187,1699 1187,1721.63 1180,1728.63 v2(1180,1754) ; v2(1178.36,3603.4) 1178.36,3603.02 1211.96,3569.42 1217.58,3569.42 v2(1250,3537) ; v2(1583,2910.68) 1583.32,2911 v2(2448.81,2911) ; v2(1593,2321) 2435.18,2321 2445.18,2331 v2(2447.92,2331) ; v2(1597.26,3492.03) v2@2441.82,3492.03 ; v2(1883,1655) 2097,1655 2129,1687 2466,1687 ; v2(2083,699) 2114.45,699 2120.12,704.66 2172.77,704.66 2238.43,639 2735.46,639 2805.96,709.5 2805.96,1250.35 2806.25,1250.65 2806.25,1662 2781.25,1687 2466,1687 ; v2(2447.92,1777.62) 2447.92,1739.08 2466,1721 2466,1687
PUMP_PWR: J5.2 Q5.D
PUMP_SW: Q6.1 R39.2 U1R.13 | length 1560.3
  Top Layer w7.87: Q6.1@979,1873.5 981,1871.5 v2(981,1707) ; v2(983.5,1605.5) R39.2@1200,1605.5 1247.46,1605.5 1254.42,1612.46 1713.49,1612.46 1790.96,1535 1980,1535 2009,1506 2009,1362.11 2026.5,1344.61 cw(c2016.5,1334.57) 2026.55,1344.55 2032.22,1338.89 ; U1R.13@2032.24,1297.7 2032.24,1338.87
  Bottom Layer w7.87: v2(981,1707) 982.25,1705.75 982.25,1606.75 v2(983.5,1605.5)
QSPI_SCLK_RP2040: U1R.52 U2R.6 | length 286.6
  Top Layer w7.87: U1R.52@2254.19,1201.73 2316.89,1201.73 2355.08,1163.54 2355.08,1120.88 2380.53,1095.43 2416.69,1095.43 2440.32,1119.06 U2R.6@2440.32,1140.71
QSPI_SD0_RP2040: U1R.53 U2R.5 | length 178.4
  Top Layer w7.87: U1R.53@2254.19,1217.48 2331.46,1217.48 2390.32,1158.62 U2R.5@2390.32,1140.71
QSPI_SD1_RP2040: U1R.55 U2R.2 | length 427.3
  Top Layer w7.87: U1R.55@2254.19,1248.98 2274,1248.98 2355.08,1330.05 2355.08,1444.05 2380.53,1469.51 2450.1,1469.51 2450.16,1469.45 2462.76,1469.45 2490.32,1441.89 U2R.2@2490.32,1420.24
QSPI_SD2_RP2040: U1R.54 U2R.3 | length 309.4
  Top Layer w7.87: U1R.54@2254.19,1233.23 2331.46,1233.23 2440.32,1342.09 U2R.3@2440.32,1420.24
QSPI_SD3_RP2040: U1R.51 U2R.7 | length 339.2
  Top Layer w7.87: U1R.51@2254.19,1185.98 2303.67,1185.98 2338.84,1150.82 2338.84,1114.85 2374.01,1079.68 2450.95,1079.68 2490.32,1119.06 U2R.7@2490.32,1140.71
QSPI_SS_RP2040: R5R.2 R7R.2 U1R.56 U2R.1 | length 1007.5
  Top Layer w7.87: R7R.2@1775.35,1335.59 1822.31,1335.59 1855.51,1302.39 1855.51,1283.98 v6(1882.64,1256.85) ; v6(2083.9,1247.01) 2150.89,1247.01 2154.83,1243.07 2212.73,1243.07 2234.38,1264.72 U1R.56@2254.19,1264.72 ; U1R.56@2267.48,1264.72 2310.79,1308.03 R5R.2@2310.79,1374.96 2310.79,1422.03 2374.01,1485.25 2496.95,1485.25 2540.32,1441.89 U2R.1@2540.32,1420.24
  Bottom Layer w7.87: v6(1882.64,1256.85) 2065.51,1256.85 2071.59,1250.77 2080.14,1250.77 v6(2083.9,1247.01)
RUN_RP2040: J1R.4 R4R.2 R6R.2 U1R.26 | length 1275.3
  Top Layer w7.87: R6R.2@1173.98,1214.53 1173.98,1168.63 1253.67,1088.94 ; v3(1261.92,949.76) 1260.59,949.76 1218.26,992.09 1218.26,1053.54 1253.67,1088.94 ; J1R.4@1353.7,1128.5 1314.14,1088.94 1253.67,1088.94 ; R4R.2@1433.82,902.52 v3(1433.82,949.76) 1539.36,949.76 1649.6,1060 1804.51,1060 1836.01,1091.5 U1R.26@1983.52,1091.5
  Bottom Layer w7.87: v3(1261.92,949.76) v3(1433.82,949.76)
SCK_RP2CAN: U1C.10 U1R.29 | length 400.1
  Top Layer w7.87: U1C.10@1696.61,865.91 1716.86,865.91 1794.23,943.28 1794.23,953.04 1846.47,1005.28 2008.03,1005.28 2016.5,1013.74 U1R.29@2016.5,1027.03
SERVO_3V3: Q3.2 Q4.3 R31.2 U1R.36 | length 1275.9
  Top Layer w7.87: Q4.3@1581,209 1584.22,212.22 1614.09,212.22 1715.31,313.43 1715.31,392.52 1683.5,424.33 R31.2@1683.5,426.83 ; Q3.2@1582.45,452.02 1660.81,452.02 1683.5,429.33 R31.2@1683.5,426.83 ; U1R.36@2126.73,1027.03 2126.73,776.73 1853,503 1725,503 1699.39,477.39 1699.39,442.73 R31.2@1683.5,426.83
SERVO_5V: J7.2 Q3.3 Q4.2 R32.2 | length 2451.7
  Top Layer w11.81: J7.2@574.4,1363.68 287,1076.28 287,636 476.5,446.5 R32.2@1363,446.5
  Top Layer w15: R32.2@1363,446.5 1454.73,446.5 1485.23,416 Q3.3@1505.55,416 1505.55,354.74 1456.07,305.27 1456.07,200.69 1483.78,172.98 Q4.2@1504.09,172.98
SWCLK_RP2040: J1R.3 U1R.24 | length 606.9
  Top Layer w7.87: J1R.3@1403.7,1128.5 1439.14,1093.07 1793.04,1093.07 1822.96,1122.99 U1R.24@1983.52,1122.99
SWDIO_RP2040: J1R.1 U1R.25 | length 718.6
  Top Layer w7.87: J1R.1@1403.7,1078.5 1403.7,1047.96 1418.26,1033.4 1418.26,1003.47 1453.67,968.07 1534.92,968.07 1644.17,1077.32 1799.56,1077.32 1829.49,1107.24 U1R.25@1983.52,1107.24
TERM_DET_RP2CAN: R1C.2 SW1C.3 U1C.9 | length 723.9
  Top Layer w7.87: SW1C.3@1128.7,1034.41 1140.51,1034.41 1198.77,976.15 1198.77,956.46 v3(1244.84,910.39) ; R1C.2@1614.92,915.91 R1C.2@1618.86,915.91 ; v6(1646.42,949.76) 1625.75,929.09 1625.75,922.8 R1C.2@1618.86,915.91 ; U1C.9@1696.61,915.91 R1C.2@1618.86,915.91
  Bottom Layer w7.87: v3(1244.84,910.39) 1449.57,910.39 1488.94,949.76 v6(1646.42,949.76)
USB_N: J2.2 R3R.1 | length 272.6
  Top Layer w7.87: R3R.1@2444.65,938.87 2449.43,943.65 2449.43,958.33 2454.04,962.94 2559.93,962.94 2566.61,956.27 2678.83,956.27 J2.2@2682.68,952.41 ; J2.2@2682.68,957.35 2688.75,957.35 J2.2@2692.68,953.41
USB_P: J2.3 R2R.1 | length 272.6
  Top Layer w7.87: R2R.1@2444.65,1004.88 2449.43,1000.1 2449.43,985.42 2454.04,980.81 2567.34,980.81 2574.01,974.14 2678.83,974.14 J2.3@2682.68,978 ; J2.3@2682.68,975.06 2688.75,975.06 J2.3@2692.68,979
USB_RP2040_N: R3R.2 U1R.46 | length 267.4
  Top Layer w7.87: U1R.46@2254.19,1107.24 2299.59,1107.24 2337.92,1068.92 2337.92,1009.64 2383.56,964 2398.91,964 2403.52,959.39 2403.52,942.59 R3R.2@2407.24,938.87
USB_RP2040_P: R2R.2 U1R.47 | length 267.4
  Top Layer w7.87: U1R.47@2254.19,1122.99 2306.12,1122.99 2353.67,1075.44 2353.67,1016.16 2390.08,979.75 2398.91,979.75 2403.52,984.36 2403.52,1001.16 R2R.2@2407.24,1004.88
VCC: D1.2 F1.1 F2.1 F4.1 F5.1 F6.1 Q1.1 Q1.2 Q1.3 Q2.1 Q2.2 Q2.3 Q5.1 Q5.2 Q5.3 R5.1 R38.1 | length 6054.7
  Top Layer w10: 2080.24,4548 2044.86,4548 2036,4556.86 2036,4628.14 2039,4631.14 2039,4715.42 2065.95,4742.37 2217.82,4742.37 2299.18,4661.02 2299.18,4632.45 D1.2@2309.63,4622 ; 2083.38,4509.74 2089.14,4509.74 2092,4506.88 2092,4504 v1(2103,4504) ; 2093,4185 v1@2093,4504
  Top Layer w30: v1@134,3667.29 v1(134,3670) 306,3498 306,3018.04 380,2944.04 380,2224 325,2169 325,2033.93 ; R38.1@795,2033.93 325,2033.93 ; Q5.1@802.7,1757 802.7,1750 780.7,1728 493.23,1728 325,1896.23 325,2033.93
  Bottom Layer w30: v1(134,3670) 26.81,3777.19 26.81,4366.81 62.13,4402.13 306.13,4402.13 371,4467 371,4724.62 389.57,4743.19 926.81,4743.19 1120,4550
  other v1: 2163,4283 2103,4284 2163,4338 2103,4339 2163,4393 2103,4394 2163,4448 2103,4449 2163,4503
VIN: F3.1 J1.5 J1.6 J1.7 J1.8 J6.3
XIN_RP2040: C1R.1 U1R.20 Y1R.1 | length 443.1
  Top Layer w7.87: C1R.1@1638.54,1266.1 1639.82,1264.82 1662.17,1264.82 1685.89,1241.1 Y1R.1@1725.16,1241.1 1725.16,1247.01 1758.62,1280.47 1821.7,1280.47 1835.39,1266.78 1835.39,1217.48 1866.89,1185.98 U1R.20@1983.52,1185.98
XOUT_RP2040: R1R.1 U1R.21 | length 82.1
  Top Layer w7.87: R1R.1@1910.27,1154.49 1910.27,1158.43 1922.08,1170.24 U1R.21@1983.52,1170.24
pads on no net: J1.9 J1.10 J1R.A J1R.B J1R.C J1R.D J1R.E J1R.F J1R.G J2.1 J2.4 J3. J4.3 J5.3 J6.7 J7. SW1R.A1 SW2R.A2 U1C.3 U1C.5 U1C.8

## Polygon pours and split planes (outlines as drawn)
VCC on Bottom Layer "VCC_L02_P213" (solid, pour order 213): 2205,4257 2067,4257 2064,4254 2064,4633 1412,4633 1020,4241 941.21,4319.79 941.21,4379.21 1337,4775 2156,4774 2205,4725
NetC14_2 on Bottom Layer "Netc6_2" (solid, pour order 227): 748.65,4303.73 918.34,4191.34 957.3,4230.3 916.61,4306.66 955.12,4389.99 908.45,4436.66 854.01,4426.06 665.92,4614.15 649.65,4617.68 560.56,4528.59 558.44,4493.94
GND on Bottom Layer "GND_L02_P272" (solid, pour order 272): 571.16,4245.04 577.17,4241.15 577.17,4228.42 395.09,4046.34 375.3,4046.34 280.54,4141.09 475.7,4336.25 491.97,4319.99
GND on Bottom Layer "Netc6_2" (solid, pour order 267): 876.53,4454.23 922.6,4456.46 975.68,4417.52 1009.56,4451.41 1051.94,4493.79 993.91,4564.54 989.67,4568.79 805.11,4753.34 788.85,4756.88 699.75,4667.78 697.63,4633.13
GND_RP2CAN on Bottom Layer "GND" (solid, pour order 264): 2866.89,1674.17 27,1674.17 27,493.07 2866.89,493.07
NetC1_2 on Bottom Layer "NETC1_2_L02_P259" (solid, pour order 259): 1755.15,3894 1755.15,3928.29 1755.15,3981.69 1479.15,3980 1418.15,3979.63 1419.15,3846 1418.15,3846 1428.15,3837 1450.15,3837 1452.15,3645 1435.15,3645 1418.15,3633 1418.15,3602 1419.15,3603 1421.65,3512 1710.15,3511 1755.15,3512 1755.15,3576
NetC7_2 on Bottom Layer "NETC7_2_L02_P260" (solid, pour order 260): 1756,2144 1756,2178.29 1756,2231.69 1480,2230 1419,2229.63 1420,2096 1419,2096 1429,2087 1451,2087 1453,1895 1436,1895 1419,1883 1419,1852 1420,1853 1422.5,1762 1711,1761 1756,1762 1756,1826
NetC6_2 on Bottom Layer "NETC6_2_L02_P261" (solid, pour order 261): 1756,2729 1756,2763.29 1756,2816.69 1480,2815 1419,2814.63 1420,2681 1419,2681 1429,2672 1451,2672 1453,2480 1436,2480 1419,2468 1419,2437 1420,2438 1422.5,2347 1711,2346 1756,2347 1756,2411
NetC2_2 on Bottom Layer "NETC2_2_L02_P262" (solid, pour order 262): 1756,3314 1756,3348.29 1756,3401.69 1480,3400 1419,3399.63 1420,3266 1419,3266 1429,3257 1451,3257 1453,3065 1436,3065 1419,3053 1419,3022 1420,3023 1422.5,2932 1711,2931 1756,2932 1756,2996
GND on Bottom Layer "GND_L02_P263" (solid, pour order 263): 2700,5000 cw(c2700,4800) 2900,4800 2899.88,1699 910.77,1700.03 6.82,1700.03 0,4800 cw(c200,4800) 200,5000
PUMP_PWR on Top Layer "PUMP_PWR_L01_P279" (solid, pour order 279): 619,1745 614,1750 449,1750 449,2033 451,2035 452,2034 758,2034 758,1753 750,1745
VCC on Top Layer "VCC_L01_P278" (solid, pour order 278): 847.82,1701 856.05,1709.23 856,1881.21 849.29,1887.91 769,1888 766,1887 766.26,1706.1 771.36,1701
GND on Top Layer "GND_L01_P277" (solid, pour order 277): 515.52,4342.65 511.64,4348.66 498.91,4348.66 319.94,4169.69 414.32,3997.33 485.44,3996.59 633.26,4220.67 590.48,4263.46
GND on Top Layer "GND_L01_P276" (solid, pour order 276): 602.01,4682.07 602.07,4682.07 692.85,4772.91 1813,4770 1881.92,4701.08 1881.92,4558 1130.33,4558 1058.58,4479.42 931.62,4352.46
VCC on Top Layer "VCC_L01_P223" (solid, pour order 223): 2416,3710 2212,3710 2212,4259 2212,4573.84 2067.47,4576.06 2072.33,4258.97 1515.25,4259 1190.85,4221.28 1190.85,4036 1717,4036 1717,1770 1766,1718 2361,1718 2416,1773
NetC14_2 on Top Layer "NETC14_2_L01_P274" (solid, pour order 274): 872.12,4411.96 896.36,4387.71 934.12,4349.96 737.77,4155.99 694.37,4113.12 600.59,4208.31 599.89,4207.6 600.59,4221.04 616.15,4236.6 481.8,4373.77 469.78,4361.75 449.27,4358.22 427.35,4380.14 428.77,4380.14 366.19,4446.25 569.48,4650.96 602.01,4682.07 647.26,4636.82
VIN on Top Layer "VIN_L01_P222" (solid, pour order 222): 451.16,2924.11 427,2983.08 427,3799 1180,4552 2016,4552 2068,4500 2068,4256 2016,4239.97 1411.97,4239.97 759.11,3587.11 759.11,2983.08 700.14,2924.11
HBRIDGE5_OUT2 on Top Layer "HBRIDGE5_OUT2_L01_P012" (solid, pour order 12): 544.07,4306.07 548.37,4313.08 481.85,4379.61 480.43,4379.61 480.43,4376.78 456.85,4376.78 433.28,4379.61 376.58,4316.58 393.55,4288.93 412.08,4281.08 467.7,4334.36 483.97,4337.89 529.93,4291.93
HBRIDGE5_OUT1 on Top Layer "HBRIDGE5_OUT1_L01_P016" (solid, pour order 16): 547.12,4303.02 554.14,4307.32 620.66,4240.79 620.66,4239.38 617.83,4239.38 611.47,4210.39 618.54,4184.93 584,4134 536,4149 540.23,4161.77 577.17,4228.42 578.94,4242.92 532.98,4288.88
NetC7_2 on Top Layer "NETC7_2_L01_P009" (solid, pour order 9): 1549,2229 1552,2170 1552,2092 1537.36,2092.28 1511,2092 1477,2058 1477,1918 1479,1918 1511,1894 1542,1871 1558,1847 1558,1830 1558,1754 1425.09,1754.09 1418,1761.19 1418,1808 1418,1856 1449.84,1890.84 1453,1906 1444.97,2060.1 1444.97,2079.57 1448,2087 1418,2112.5 1418,2172 1418,2229 1436.87,2229
HBRIDGE4_OUT1 on Top Layer "HBRIDGE4_OUT1_L01_P246" (solid, pour order 246): 1445,1985.68 1453,1983.77 1453,1889.68 1452,1888.68 1450,1890.68 1433.33,1874.01 1418.66,1855.34 1341,1851 1326.45,1891.37 1334,1901 1411,1911.68 1425,1920.68 1425,1985.68
GND on Top Layer "GND_L01_P252" (solid, pour order 252): 1420.15,3798 1421.65,3805 1412.65,3814 1155.15,3814 1141.15,3800 1141.15,3666 1417.15,3666 1417.15,3689
HBRIDGE1_OUT1 on Top Layer "HBRIDGE1_OUT1_L01_P251" (solid, pour order 251): 1444.15,3735.68 1452.15,3733.77 1452.15,3639.68 1451.15,3638.68 1449.15,3640.68 1432.48,3624.01 1417.81,3605.34 1340.15,3601 1325.6,3641.37 1333.15,3651 1410.15,3661.68 1424.15,3670.68 1424.15,3735.68
HBRIDGE1_OUT2 on Top Layer "HBRIDGE1_OUT2_L01_P250" (solid, pour order 250): 1444.15,3740 1452.15,3741.92 1452.15,3836 1451.15,3837 1449.15,3835 1424.15,3851 1411.15,3874 1343.15,3873 1325.6,3834.31 1335.15,3823 1412.65,3814 1424.15,3805 1424.15,3740
GND on Top Layer "Netc6_2" (solid, pour order 8): 1784,3866 1818.15,3897 1828.15,3962.07 1876.07,3962.07 1936,3962.07 1945,3871 1945,3865 1945,3604 1936,3590 1810,3590 1784,3613
NetC1_2 on Top Layer "Netc6_2" (solid, pour order 5): 1587.15,3882 1624.73,4067 1687.17,4067 1707.99,3998.69 1794.15,3967 1794.15,3901 1748.15,3870 1748.15,3604 1739.15,3590 1613.15,3590 1587.15,3613
NetC1_2 on Top Layer "NETC1_2_L01_P249" (solid, pour order 249): 1548.15,3979 1551.15,3920 1551.15,3842 1536.51,3842.28 1510.15,3842 1476.15,3808 1476.15,3668 1478.15,3668 1510.15,3643.35 1541.15,3621 1557.15,3589 1557.15,3580 1557.15,3504 1428.48,3504.52 1417.15,3515.85 1417.15,3558 1417.15,3606 1448.99,3640.84 1452.15,3656 1452.15,3836 1451.15,3837 1447.15,3837 1419.93,3864.22 1419.15,3922 1417.15,3979 1436.02,3979
GND on Top Layer "GND_L01_P247" (solid, pour order 247): 1421,2048 1422.5,2055 1413.5,2064 1156,2064 1142,2050 1142,1916 1418,1916 1418,1939
HBRIDGE4_OUT2 on Top Layer "HBRIDGE4_OUT2_L01_P231" (solid, pour order 231): 1445,1990 1453,1991.92 1453,2086 1452,2087 1450,2085 1425,2101 1412,2124 1344,2123 1326.45,2084.31 1336,2073 1413.5,2064 1425,2055 1425,1990
GND on Top Layer "Netc6_2" (solid, pour order 63): 1784.85,2116 1819,2147 1829,2212.07 1876.92,2212.07 1936.85,2212.07 1945.85,2121 1945.85,2115 1945.85,1854 1936.85,1840 1810.85,1840 1784.85,1863
NetC7_2 on Top Layer "Netc6_2" (solid, pour order 15): 1588,2132 1625.58,2317 1688.02,2317 1708.84,2248.69 1795,2217 1795,2151 1749,2120 1749,1854 1740,1840 1614,1840 1588,1863
GND on Top Layer "GND_L01_P230" (solid, pour order 230): 1421,2633 1422.5,2640 1413.5,2649 1156,2649 1142,2635 1142,2501 1418,2501 1418,2524
HBRIDGE3_OUT1 on Top Layer "HBRIDGE3_OUT1_L01_P229" (solid, pour order 229): 1445,2570.68 1453,2568.77 1453,2474.68 1452,2473.68 1450,2475.68 1433.33,2459.01 1418.66,2440.34 1341,2436 1326.45,2476.37 1334,2486 1411,2496.68 1425,2505.68 1425,2570.68
HBRIDGE3_OUT2 on Top Layer "HBRIDGE3_OUT2_L01_P228" (solid, pour order 228): 1445,2575 1453,2576.92 1453,2671 1452,2672 1450,2670 1425,2686 1412,2709 1344,2708 1326.45,2669.31 1336,2658 1413.5,2649 1425,2640 1425,2575
GND on Top Layer "Netc6_2" (solid, pour order 204): 1784.85,2701 1819,2732 1829,2797.07 1876.92,2797.07 1936.85,2797.07 1945.85,2706 1945.85,2700 1945.85,2439 1936.85,2425 1810.85,2425 1784.85,2448
NetC6_2 on Top Layer "Netc6_2" (solid, pour order 19): 1588,2717 1625.58,2902 1688.02,2902 1708.84,2833.69 1795,2802 1795,2736 1749,2705 1749,2439 1740,2425 1614,2425 1588,2448
NetC6_2 on Top Layer "NETC6_2_L01_P013" (solid, pour order 13): 1549,2814 1552,2755 1552,2677 1537.36,2677.28 1511,2677 1477,2643 1477,2503 1479,2503 1511,2477 1542,2456 1558,2430 1558,2415 1558,2339 1425.64,2339.64 1418,2347.28 1418,2393 1418,2441 1449.84,2475.84 1453,2491 1453,2659 1444.97,2664.57 1448,2672 1418,2697.5 1418,2758 1418,2814 1436.87,2814
GND on Top Layer "GND_L01_P226" (solid, pour order 226): 1421,3218 1422.5,3225 1413.5,3234 1156,3234 1142,3220 1142,3086 1418,3086 1418,3109
HBRIDGE2_OUT1 on Top Layer "HBRIDGE2_OUT1_L01_P225" (solid, pour order 225): 1445,3155.68 1453,3153.77 1453,3059.68 1452,3058.68 1450,3060.68 1433.33,3044.01 1418.66,3025.34 1341,3021 1326.45,3061.37 1334,3071 1411,3081.68 1425,3090.68 1425,3155.68
HBRIDGE2_OUT2 on Top Layer "HBRIDGE2_OUT2_L01_P224" (solid, pour order 224): 1445,3160 1453,3161.92 1453,3256 1452,3257 1450,3255 1425,3271 1412,3294 1344,3293 1326.45,3254.31 1336,3243 1413.5,3234 1425,3225 1425,3160
GND on Top Layer "Netc6_2" (solid, pour order 205): 1784.85,3286 1819,3317 1829,3382.07 1876.92,3382.07 1936.85,3382.07 1945.85,3291 1945.85,3285 1945.85,3024 1936.85,3010 1810.85,3010 1784.85,3033
NetC2_2 on Top Layer "Netc6_2" (solid, pour order 27): 1588,3302 1625.58,3487 1688.02,3487 1708.84,3418.69 1795,3387 1795,3321 1749,3290 1749,3024 1740,3010 1614,3010 1588,3033
NetC2_2 on Top Layer "NETC2_2_L01_P014" (solid, pour order 14): 1549,3399 1552,3340 1552,3262 1537.36,3262.28 1511,3262 1477,3228 1477,3088 1479,3088 1511,3063.35 1542,3041 1558,3014 1558,3000 1558,2924 1428.36,2924.22 1418,2930 1418,2978 1418,3026 1449.84,3060.84 1453,3076 1444.77,3249.77 1442.77,3251.77 1418,3282.5 1418,3343 1418,3399 1436.87,3399
NetF3_2 on Top Layer "NETF3_2_L01_P214" (solid, pour order 214): 2515.05,3756.94 2515.05,4512.83 2490,4537.89 2252.11,4537.89 2227.06,4512.83 2227.5,3756.94 2242,3740.1 2498.22,3740.1
3V3_RP2CAN on Top Layer "3V3_RP2040" (solid, pour order 212): 2599.17,646.38 1170.43,646.38 1170.43,1566.38 2599.17,1566.38

## Keep-outs
Keep-Out Layer:
  region: 2615,465 2557,407 2555,407 2555,120 2680,120 ccw(c2680,340) 2900,340 2900,465
  region: 2680,4770 cw(c2680,4550) 2900,4550 2900,4425 2555,4425 2555,4770
  region: 286,4425 345,4484 345,4770 220,4770 ccw(c220,4550) 0,4550 0,4425
  region: 220,120 cw(c220,340) 0,340 0,465 345,465 345,120
  lines w10: 0,4750 cw(c250,4750) 250,5000 2649.88,5000 ; 2648.66,5000 cw(c2648.66,4750) 2898.66,4750 ; 2900,462 2900,4748.03

## Other copper
Top Layer:
  pour cut-out: 2046.89,1164.94 1996.89,1214.94 1996.89,1259.94 2086.89,1259.94 2086.89,1224.94
  pour cut-out: 2141.57,775.2 2057.36,690.99 2057.36,687.79 2059.7,687.79 2065.87,681.61 2146.19,761.92 2146.19,773.28
  pour cut-out: 1798.15,3973 1797.15,3896 1754.15,3868 1752.15,3868 1752.15,3590 1754.15,3588 1794.15,3588 1794.15,3599 1780.15,3613 1780.15,3871 1814.15,3905 1814.15,3960 1828.15,3970
  pour cut-out: 1799,2223 1798,2146 1755,2118 1753,2118 1753,1840 1755,1838 1795,1838 1795,1849 1781,1863 1781,2121 1815,2155 1815,2210 1829,2220
  pour cut-out: 1799,2808 1798,2731 1755,2703 1753,2703 1753,2425 1755,2423 1795,2423 1795,2434 1781,2448 1781,2706 1815,2740 1815,2795 1829,2805
  pour cut-out: 1799,3393 1798,3316 1755,3288 1753,3288 1753,3010 1755,3008 1795,3008 1795,3019 1781,3033 1781,3291 1815,3325 1815,3380 1829,3390
  pour cut-out: 2137.11,1272.04 2136.89,1271.82 2136.89,1055.07 2189.5,1055.07 2216.82,1082.39 2216.82,1155 2231.89,1170.07 2231.89,1270.07
  pour cut-out: 1706.89,649.17 1916.89,649.17 1921.89,654.17 1921.89,904.17 1781.89,904.17 1691.89,844.17
  pour cut-out: 1839.08,1284.86 1839.04,1284.89 1839.04,1305.29 1638.47,1304.17 1626.95,1292.65 1626.95,1288.01 1662.52,1288.01 1686.58,1263.95 1708.75,1263.95 1723.76,1278.97 1733.76,1278.97
  pour cut-out: 1336.31,1026.33 1340.37,1037.07 1340.37,1069.96 1334.31,1076.01 1304.31,1076.01 1304.31,1051.01 1314.31,1041.01
Bottom Layer:
  pour cut-out: 2714.72,497.69 2862.27,645.24 2862.27,497.69 2866.89,493.07 2716.63,493.07
  pour cut-out: 1431.15,3789 1424.15,3786.41 1424.15,3684 1451.75,3684 1448.45,3687.3 1445.15,3693 1443.15,3790
  pour cut-out: 1432,2039 1425,2036.41 1425,1934 1452.6,1934 1449.3,1937.3 1446,1943 1444,2040
  pour cut-out: 1432,2624 1425,2621.41 1425,2519 1452.6,2519 1449.3,2522.3 1446,2528 1444,2625
  pour cut-out: 1432,3209 1425,3206.41 1425,3104 1452.6,3104 1449.3,3107.3 1446,3113 1444,3210

## Silkscreen, mask and mechanical layers (free items; w line width, h text height)
Top Overlay:
  drawing of 19 lines, arcs and shapes, not listed
  text "Motor / Power" at 2562.83,4243.9 h84 r270
  text "The Underwater Robotics Team" at 2049,3298 h60 r270
  text "HBridge Board" at 2203.99,2943 h60 r270
  text "BOOT" at 1577.99,1498.69 h40 r180
  text "RESET" at 1366.3,1493.99 h40 r180
  text "TERM / ON" at 1134.18,854.17 h40 r180
  text "3.3V" at 2400.03,725.02 h60